# Altium PCB Actuator_Base_Board.PcbDoc
Units mm, origin at the board's own origin, x right, y up, seen from the top; angles counter-clockwise.
Board outline 152.4 x 101.6 mm, 6 copper layers (Top Layer, Layer 3, Layer 1, Layer 2, Layer 4, Bottom Layer), stack 0.958 mm thick; 34 components, 24 nets, 129 pads, 24 vias.
Unrouted connection lines stored in the file: 1.
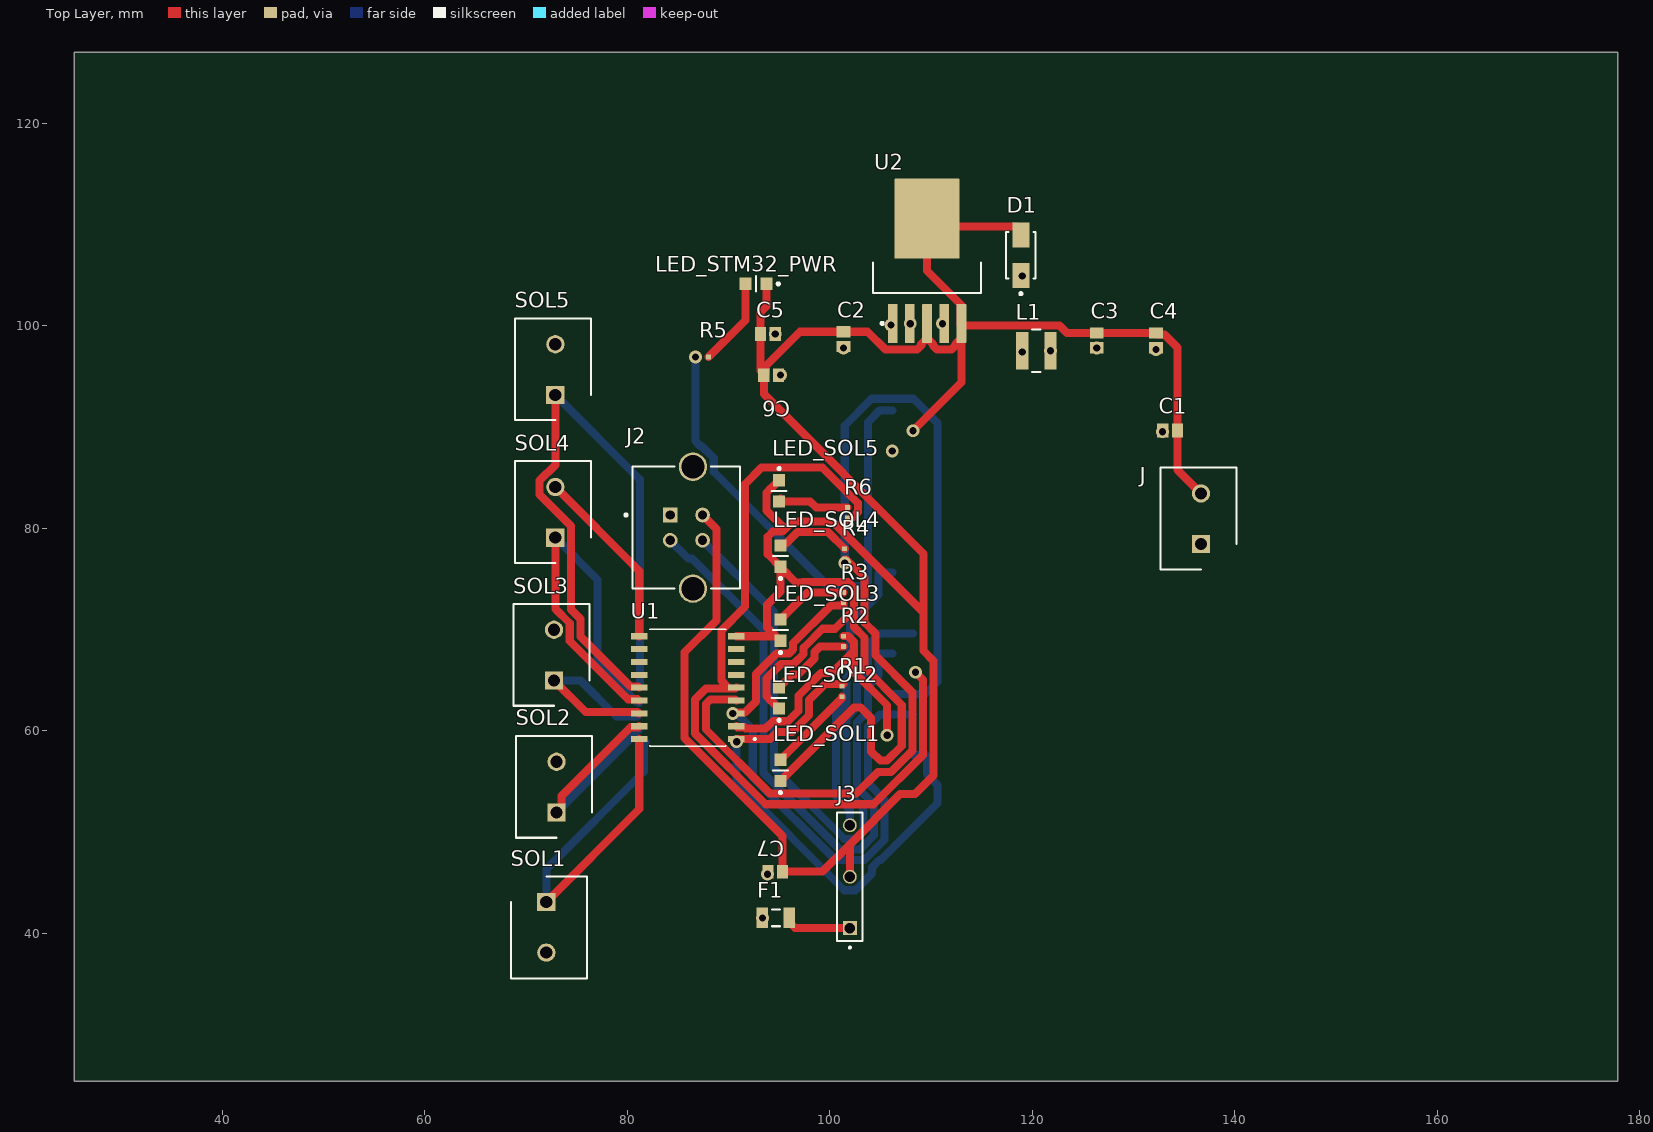
[diagram p0: Top Layer view]
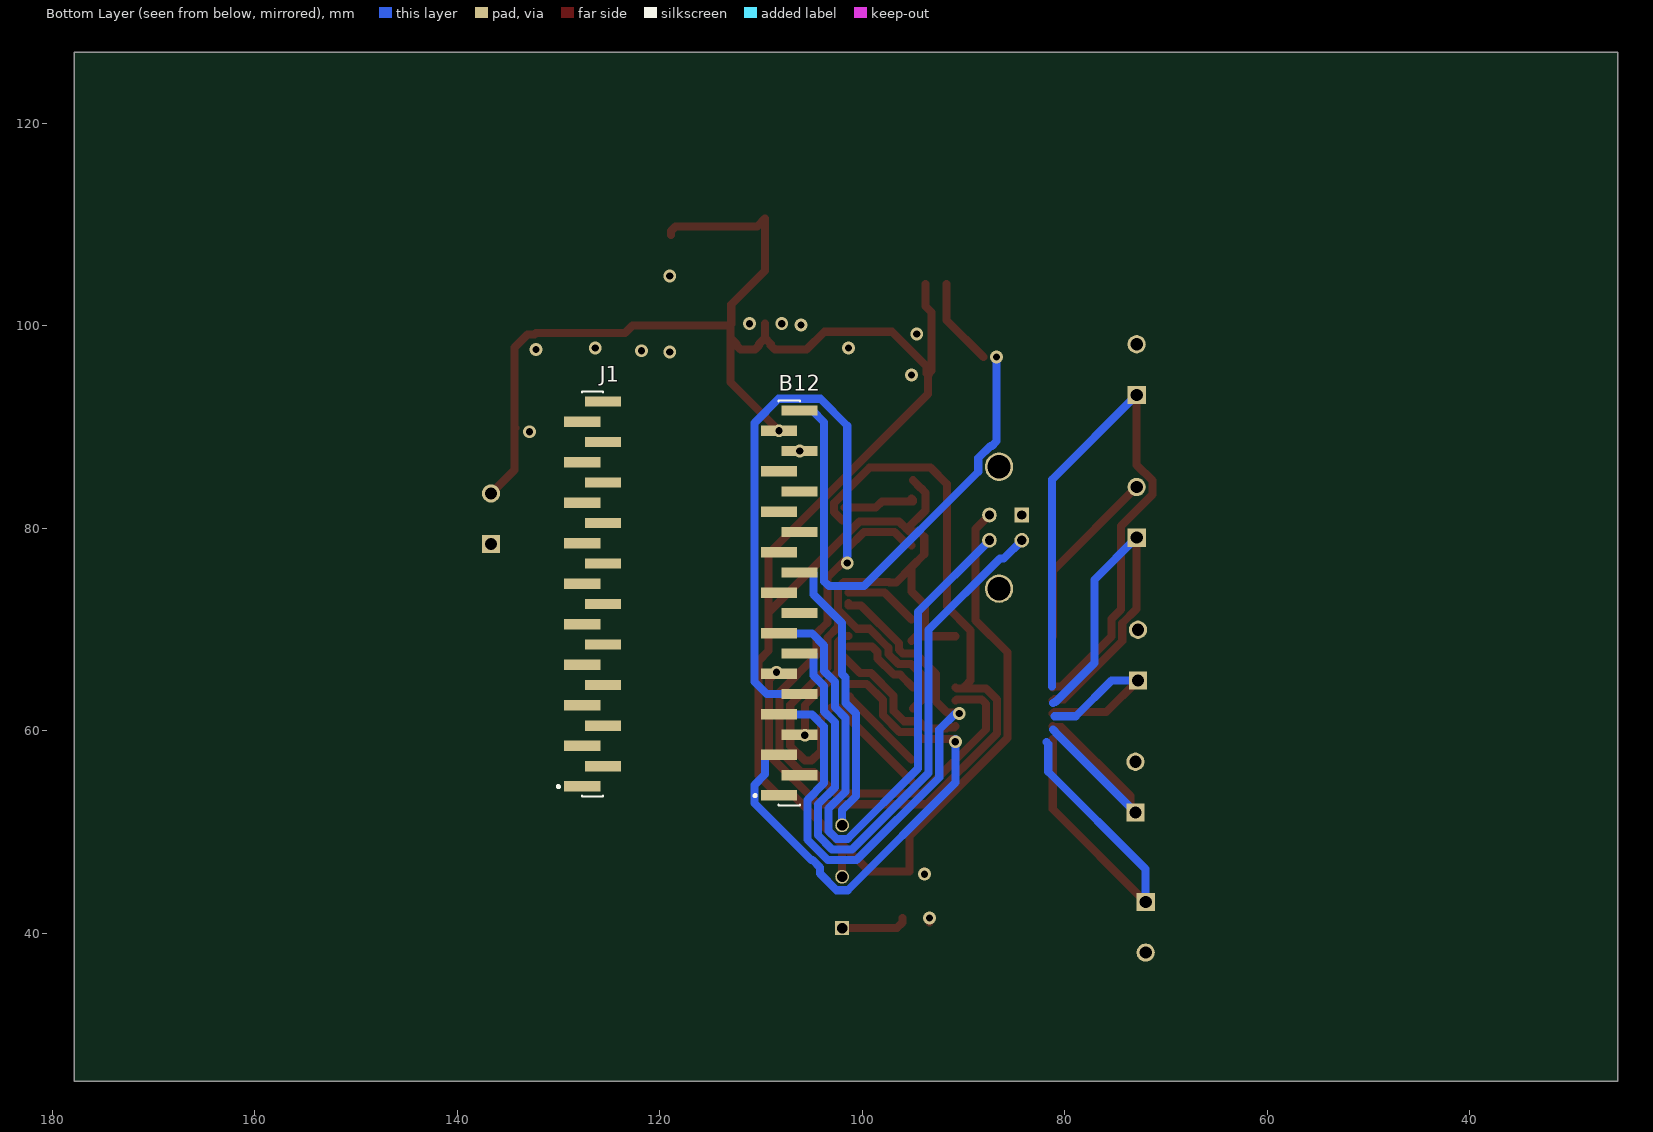
[diagram p1: Bottom Layer view, seen from below]
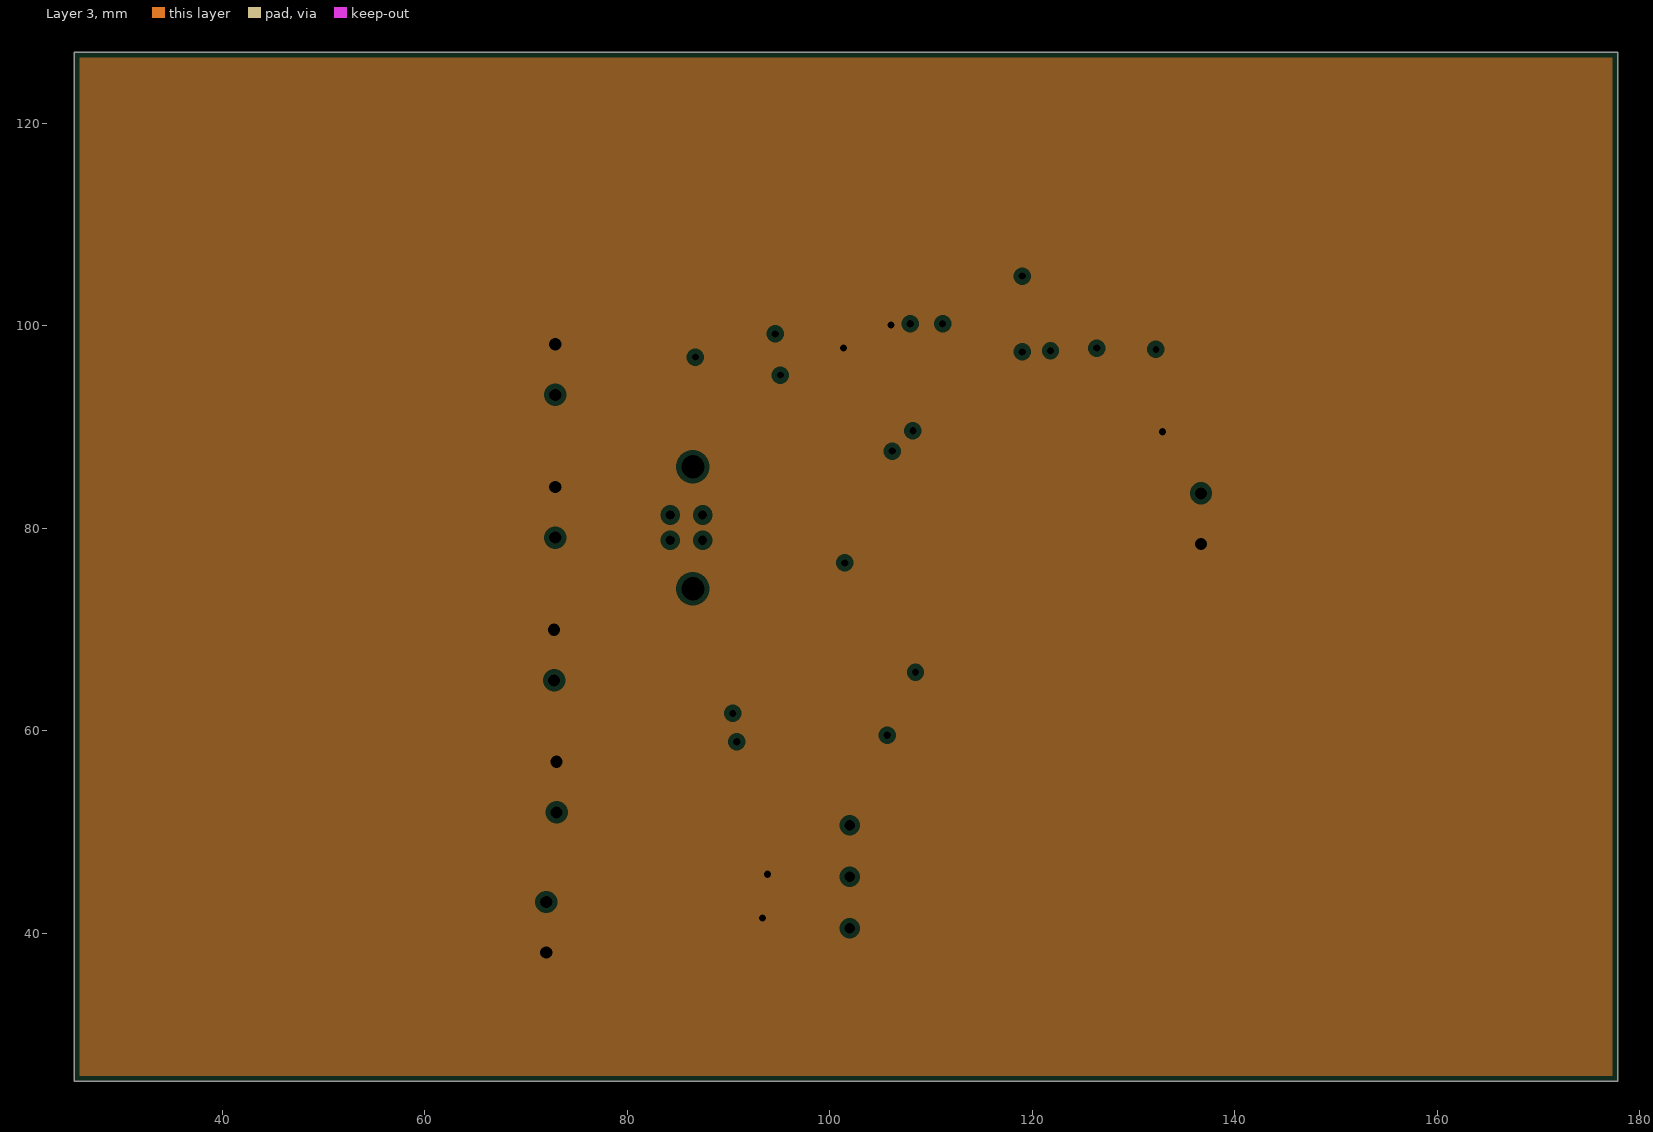
[diagram p2: Layer 3, clearances drawn from the general rule]
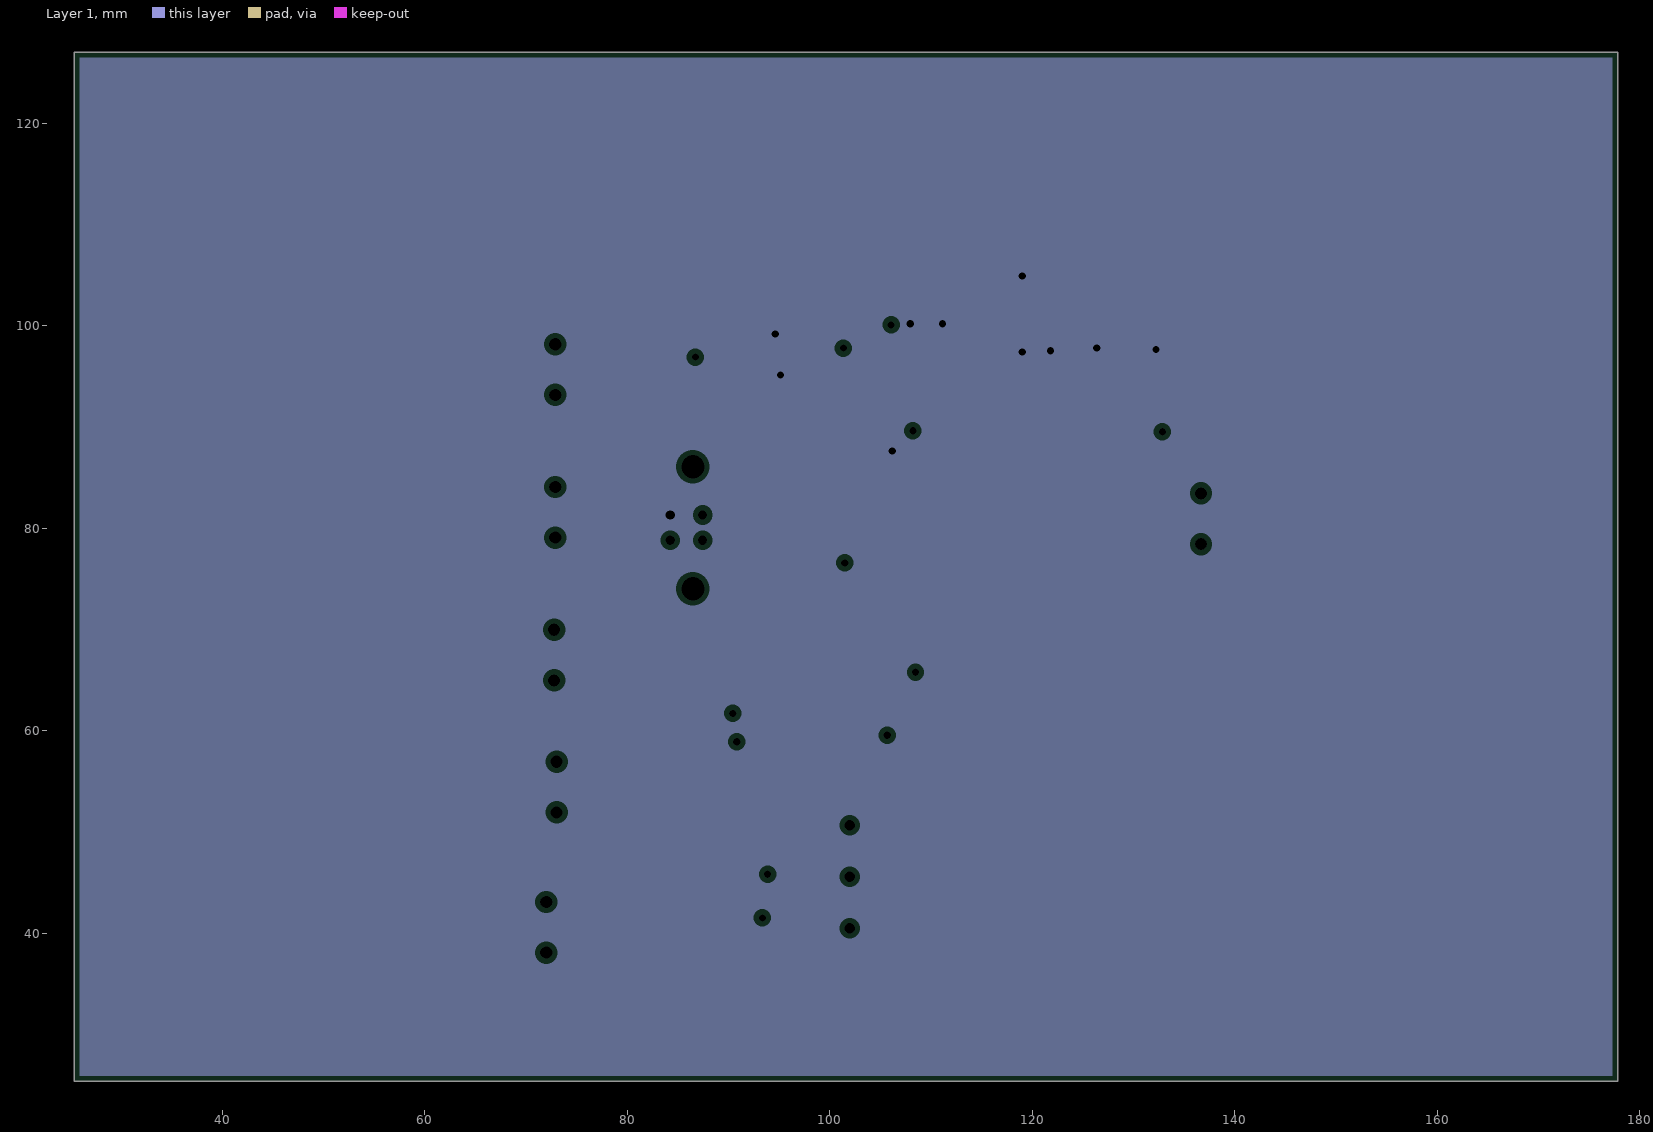
[diagram p3: Layer 1, clearances drawn from the general rule]
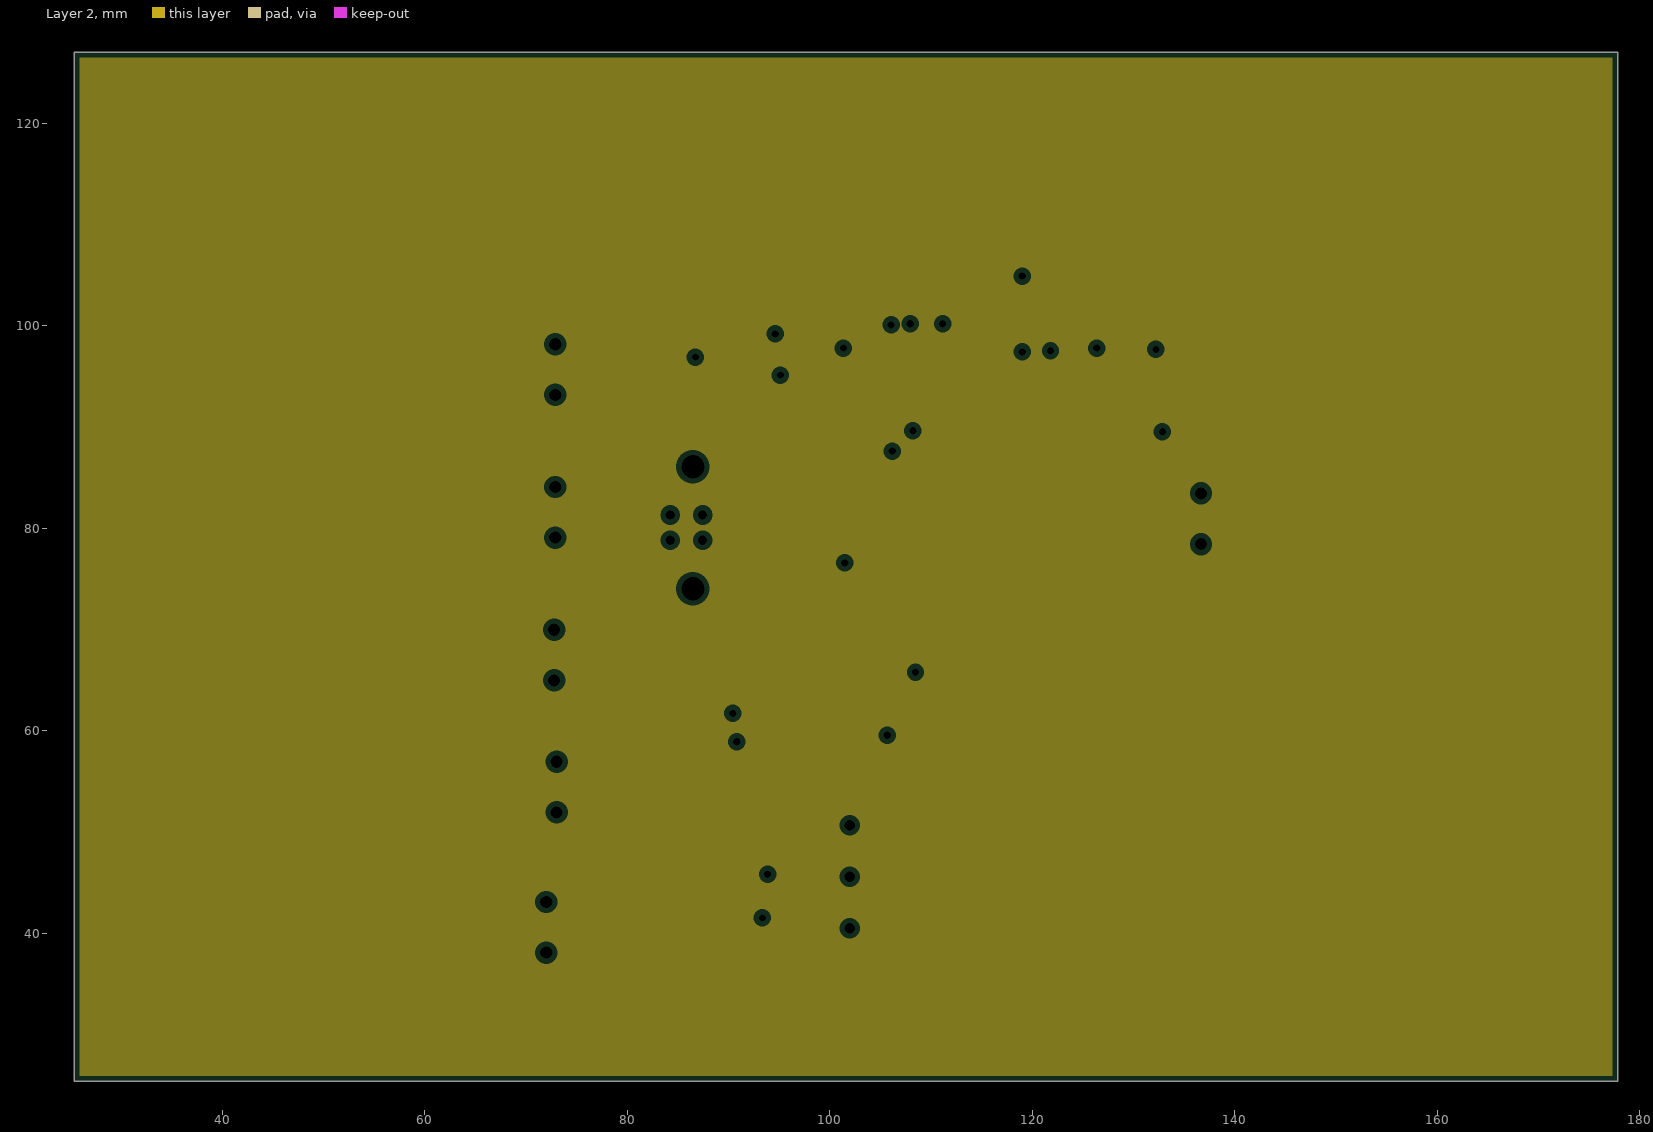
[diagram p4: Layer 2, clearances drawn from the general rule]
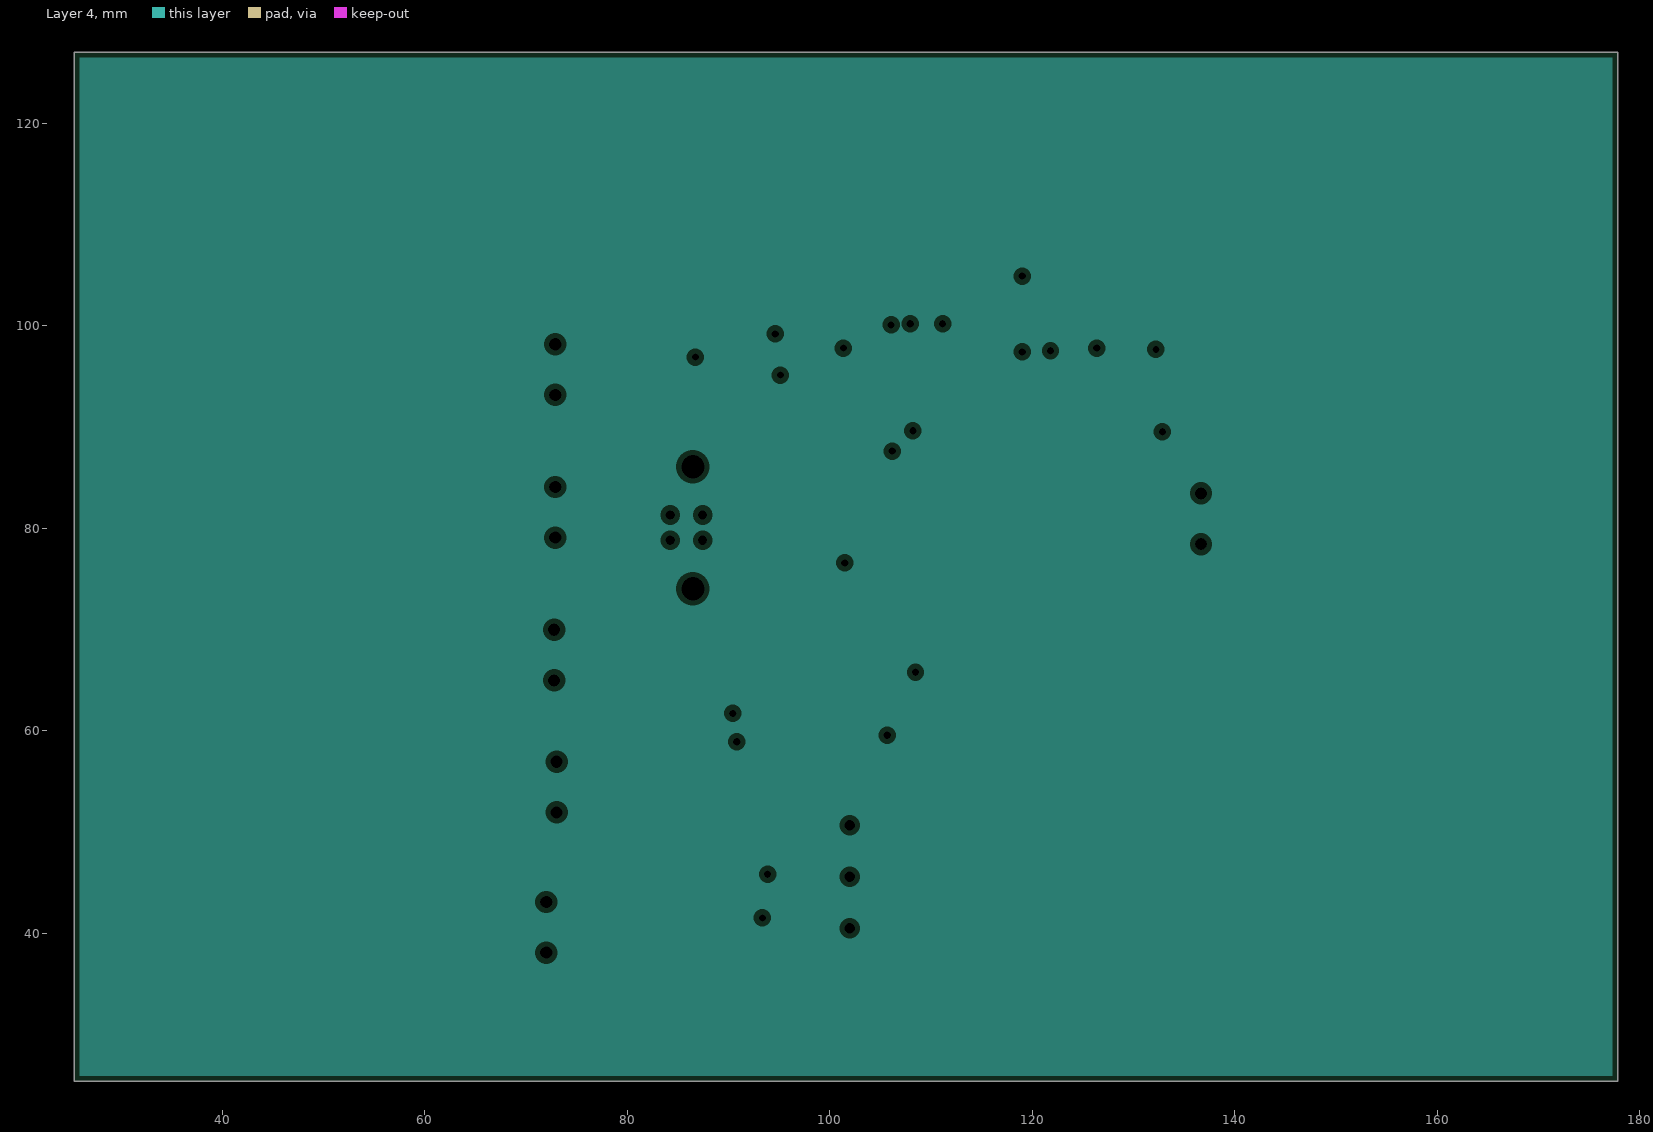
[diagram p5: Layer 4, clearances drawn from the general rule]

## Layer stack, top to bottom
Top Solder: solder mask 0.0102, Solder Resist, Dk 3.5
Top Layer: signal copper 0.0356
Dielectric 6: prepreg 0.0711, PP-006, Dk 4.1
Dielectric 4: prepreg 0.0711, PP-006, Dk 4.1
Layer 3: plane copper 0.035, net +12
Dielectric 2: prepreg 0.0711, PP-006, Dk 4.1
Layer 1: plane copper 0.035, net +5
Dielectric 1: dielectric 0.32, FR-4, Dk 4.8
Layer 2: plane copper 0.035
Dielectric 3: prepreg 0.0711, PP-006, Dk 4.1
Layer 4: plane copper 0.035
Dielectric 5: prepreg 0.0711, PP-006, Dk 4.1
Dielectric 7: prepreg 0.0711, PP-006, Dk 4.1
Bottom Layer: signal copper 0.0356
Bottom Solder: solder mask 0.0102, Solder Resist, Dk 3.5

## Board outline
25.4,25.4 177.8,25.4 177.8,127 25.4,127

## Design rules (kind name [scope] priority, off if disabled: settings)
Clearance [All] p1: gap=0.25 ignorepadtopadclearanceinfootprint=FALSE
PlaneClearance [All] p1: clearance=0.508
PlaneConnect [All] p1: planeconnectstyle=Relief reliefexpansion=0.508 reliefentries=4 reliefconductorwidth=0.254 reliefairgap=0.254
PolygonConnect [All] p1: connectstyle=Relief reliefconductorwidth=0.254 reliefentries=4 polygonreliefangle="90 Angle" airgapwidth=0.254
RoutingVias [All] p1: holewidth=0.711 width=1.27 viastyle="Through Hole" minholewidth=0.711 minwidth=1.27 maxholewidth=0.711 maxwidth=1.27
SolderMaskExpansion [All] p1: expansion=0 istentingtop=FALSE
SupplyNets "Schematic Supply Nets_2" [InNet('+12')] p1: voltage=0.000
SupplyNets "Schematic Supply Nets_1" [InNet('SOL1_STATUS')] p2: voltage=0.000
SupplyNets "Schematic Supply Nets" [InNet('+5')] p3: voltage=0.000
Width [All] p1: maxlimit=1.5 minlimit=0.4 preferedwidth=0.8 minimp=50.000000 maximp=50.000000 favimp=50.000000
28 further rules are at their usual default settings.

## Components (designator, comment, footprint, x,y, rotation, side; value= is the part's Value field where it differs from the comment)
B12 "TMM-120-01-L-S-SM" FP-TMM-120-01-L-S-SM-MFG 107.199,72.629 r90 bottom
C1 "100nF" CAPC2013X145X48LL20T23 133.604,89.662 r0 top
C2 "680uF" CAPC2013X145X48LL20T23 101.346,98.679 r90 top
C3 "220uF" CAPC2013X145X48LL20T23 126.365,98.552 r270 top
C4 "100nF" CAPC2013X145X48LL20T23 132.207,98.552 r90 top
C5 "100nF" CAPC2013X145X48LL20T23 93.89,99.187 r180 top
C6 "10uF" CAPC2013X145X48LL20T23 94.197,95.123 r180 top
C7 "100nF" CAPC2013X145X48LL20T23 94.615,46.101 r180 top
D1 "B340A-13-F" FP-SMA-MFG 118.872,106.966 r90 top
F1 "0466003.NR" FP-0466-MFG 94.678,41.529 r0 top value=0.019Ω
J "4948956" SHDR2W100P0X500_1X2_1000X750X1 136.652,78.439 r90 top
J1 "TMM-120-01-L-S-SM" FP-TMM-120-01-L-S-SM-MFG 126.63,73.517 r90 bottom
J2 "M701-330442" HRWN-M701-330442_V 85.837,80.061 r90 top
J3 "TSW-203-16-T-S" SAMTEC_TSW-203-16-T-S 101.981,40.513 r90 top
L1 "33uH" FP-NR4018-MFG 120.396,97.536 r0 top
LED_SOL1 "SML-LX0805UWC-TR" FP-SML-LX0805UWC-TR-MFG 95.123,56.1 r90 top
LED_SOL2 "SML-LX0805UWC-TR" FP-SML-LX0805UWC-TR-MFG 94.996,63.246 r90 top
LED_SOL3 "SML-LX0805UWC-TR" FP-SML-LX0805UWC-TR-MFG 95.123,69.943 r90 top
LED_SOL4 "SML-LX0805UWC-TR" FP-SML-LX0805UWC-TR-MFG 95.123,77.25 r90 top
LED_SOL5 "SML-LX0805UWC-TR" FP-SML-LX0805UWC-TR-MFG 94.996,83.693 r270 top
LED_STM32_PWR "SML-LX0805UWC-TR" FP-SML-LX0805UWC-TR-MFG 92.71,104.14 r180 top
R1 "1K" RES_ERJU02F1543X 101.219,63.881 r270 top
R2 "1K" RES_ERJU02F1543X 101.346,68.834 r270 top
R3 "1K" RES_ERJU02F1543X 101.346,73.152 r90 top
R4 "1K" RES_ERJU02F1543X 101.473,77.47 r90 top
R5 "1K" RES_ERJU02F1543X 87.503,96.901 r0 top
R6 "1K" RES_ERJU02F1543X 101.727,81.53 r90 top
SOL1 "4948956" SHDR2W100P0X500_1X2_1000X750X1 72.009,43.1 r270 top
SOL2 "4948956" SHDR2W100P0X500_1X2_1000X750X1 73.025,51.943 r90 top
SOL3 "4948956" SHDR2W100P0X500_1X2_1000X750X1 72.771,64.977 r90 top
SOL4 "4948956" SHDR2W100P0X500_1X2_1000X750X1 72.898,79.074 r90 top
SOL5 "4948956" SHDR2W100P0X500_1X2_1000X750X1 72.898,93.171 r90 top
U1 "ULN2803AFW" SOIC127P1030X265-18N 85.979,64.262 r180 top
U2 "LM2596S-5.0/NOPB" KTT0005B_L 109.601,106.426 r90 top

## Footprints (in the part's own frame and the unit in brackets; to place one, negate y for a bottom-side part, rotate by r counter-clockwise, add the part's x,y. Pads: shape width x height; smd on the part's side, far side on the other; paste and mask are expansions set on the pad)
CAPC2013X145X48LL20T23 [mm] "Chip Capacitor, 2-Leads, Body 2.00x1.25mm, IPC High Density"
  rect 1.1x1.35 smd: 1(-0.725,0) 2(0.725,0)
  body extent -1.1,-0.72 1.1,0.72, height 1.45
FP-0466-MFG [mil]
  rect 45x80 smd paste+0 mask+0: 1(-52.5,0) 2(52.5,0)
  silkscreen extent -15,-32 15,32, body extent -79,-44 79,44, height 10
FP-NR4018-MFG [mm]
  rect 1.2x3.7 smd paste+0 mask+0: 1(-1.4,0) 2(1.4,0)
  silkscreen extent -0.43,-2.1 0.43,2.1, body extent -2.2,-2.2 2.2,2.2, height 0.25
FP-SMA-MFG [mm]
  rect 2.5x1.7 smd paste+0 mask+0: 1(-2,0) 2(2,0)
  silkscreen extent -3.92,-1.46 2.3,1.46, body extent -3.35,-1.56 3.35,1.56, height 0.25
FP-SML-LX0805UWC-TR-MFG [mm]
  rect 1.2x1.2 smd paste+0 mask+0: 1(-1.05,0) 2(1.05,0)
  silkscreen extent -2.32,-0.75 0,0.75, body extent -1.75,-0.85 1.75,0.85, height 0.25
FP-TMM-120-01-L-S-SM-MFG [mm]
  rect 1.02x3.56 smd paste+0 mask+0: 1(-19,1.015) 2(-17,-1.015) 3(-15,1.015) 4(-13,-1.015) 5(-11,1.015) 6(-9,-1.015) 7(-7,1.015) 8(-5,-1.015) 9(-3,1.015) 10(-1,-1.015) 11(1,1.015) 12(3,-1.015) 13(5,1.015) 14(7,-1.015) 15(9,1.015) 16(11,-1.015) 17(13,1.015) 18(15,-1.015) 19(17,1.015) 20(19,-1.015)
  silkscreen extent -20,-1.05 20,3.49, body extent -20,-2.41 20,2.41, height 6.22
HRWN-M701-330442_V [mm] "USB, 4-Leads, Body 12.04x10.6mm, Pitch 2.5mm"
  rect 1.45x1.45 hole 0.92: 1(1.25,1.6)
  round 1.45 hole 0.92: 2(-1.25,1.6) 3(-1.25,-1.6) 4(1.25,-1.6)
  round 2.8 hole 2.3: 5(6.02,-0.65) 6(-6.02,-0.65)
  silkscreen extent -6.02,-5.3 6.02,6.08, body extent -7.33,-5.72 7.33,4.99, height 16.5
KTT0005B_L [mm] "DPAK, 5-Leads, Body 10.65x9.65mm, Pitch 1.7mm, IPC High Density"
  rrect11% 3.85x0.95 smd: 1(-6.2,3.4) 2(-6.2,1.7) 3(-6.2,0) 4(-6.2,-1.7) 5(-6.2,-3.4)
  rrect2% 7.9x6.4 smd: 6(4.15,0)
  silkscreen extent -6.32,-5.35 -0.2,5.35, body extent -3.2,-5.32 6.45,5.33, height 4.83
RES_ERJU02F1543X [mm]
  rect 0.475x0.5 smd: 1(-0.512,0) 2(0.512,0)
SAMTEC_TSW-203-16-T-S [mm]
  rect 1.37x1.37 hole 1.02: 01(0,0)
  round 1.37 hole 1.02: 02(5.08,0) 03(10.16,0)
  silkscreen extent -2.02,-1.27 11.43,1.27
SHDR2W100P0X500_1X2_1000X750X1 [mm]
  rect 1.8x1.8 hole 1.2: 1(0,0)
  round 1.8 hole 1.2: 2(5,0)
  silkscreen extent -2.5,-3.5 7.55,4
SOIC127P1030X265-18N [mm]
  rect 1.64x0.6 smd: 1(-4.79,5.08) 2(-4.79,3.81) 3(-4.79,2.54) 4(-4.79,1.27) 5(-4.79,0) 6(-4.79,-1.27) 7(-4.79,-2.54) 8(-4.79,-3.81) 9(-4.79,-5.08) 10(4.79,-5.08) 11(4.79,-3.81) 12(4.79,-2.54) 13(4.79,-1.27) 14(4.79,0) 15(4.79,1.27) 16(4.79,2.54) 17(4.79,3.81) 18(4.79,5.08)
  silkscreen extent -6.71,-5.77 3.75,5.77, body extent -5.78,-5.16 5.78,5.16, height 2.64

## Part data
B12 J1: library part CMP-02766-001494-1, "2MM TERMINAL STRIP", Flammability Rating="UL94 V-0", Insulation Color=Black, Max Operating Temperature=125°C, Min Operating Temperature=-55°C, Connector Type=Header, Contact Finish - Mating=GOLD, Contact Material=Bronze, Contact Plating=Gold, Contact Shape=Square, Contact Type="Male Pin", Fastening Type=Pull, Gender=Male, Insulation Material=Polymer, Lead Free="Lead Free", Mount="Surface Mount", Number of Contacts=20, Number of Positions=20, Number of Rows=1, Packaging=Rail/Tube, REACH SVHC="No SVHC", Series=TMM, Termination=Solder
C1 C2 C3 C4 C5 C6 C7: library part CMP-2007-03205-1, Manufacturer=Vitramon, Part Number=VJ0805Y682KXAMT
D1: library part CMP-1667-00003-3, "DIODE SCHOTTKY 40V 3A SMA", Average Rectified Current=3A, Capacitance=250pF, Case/Package=SMA, Forward Voltage=500mV, Max Forward Surge Current (Ifsm)=80A, Max Operating Temperature=125°C, Max Repetitive Reverse Voltage (Vrrm)=40V, Max Reverse Current=500uA, Min Operating Temperature=-55°C, Package Quantity=5000, Contact Plating=Tin, Current=3A, Current Rating=3A, Element Configuration=Single, Forward Current=3A, Height=2.3mm, Lead Free="Lead Free", Length=4.6mm, Max Reverse Voltage (DC)=40V, Mount="Surface Mount", Number of Pins=2, Output Current=3A, Packaging="Tape and Reel", Peak Non-Repetitive Surge Current=80A, Polarity=Standard, Radiation Hardening=No, REACH SVHC="No SVHC", RoHS Compliant=Yes, Series=-, Termination=SMD/SMT, Voltage=40V, Voltage Rating (DC)=40V, Weight=0.002258oz, Width=2.92mm
F1: library part CMP-08605-000054-1_1, "FUSE BOARD MNT 3A 32VAC/VDC 1206", Fuse Current=3A, Fuse Interrupt Ac Current=50A, Fuse Voltage Drop=75.99mV, Manufacturer=Littelfuse, Max Fuse Ac Voltage=32V, Package=0466, Resistance=0.019Ω, Temperature="-55°C to +90°C", Temperature Range High=+90°C, Temperature Range Low=-55°C, Automotive=No, Category=Fuse, ComponentLink2Description=Datasheet, ComponentLink2URL=https://www.littelfuse.com/~/media/electronics/datasheets/fuses/littelfuse_fuse_466_datasheet.pdf.pdf, Device Class L1="Circuit Protection", Device Class L2=Fuses, Device Class L3=unset, Digikey Description="FUSE BOARD MNT 3A 32VAC/VDC 1206", Fuse Blow Speed=Fast, Fuse I2T=0.576A2Sec, Fuse Interrupt Dc Current=50A, Height=0.66mm, Lead Free=Yes, Manufacturer Part Number=0466003.NR, Max Fuse Dc Voltage=32V, Mouser Description="Surface Mount Fuses 32V 3A VFA Slimline", Octopart=https://octopart.com/0466003.nr-littelfuse-565175, RoHS=TRUE, Voltage Rating=32V
J SOL1 SOL2 SOL3 SOL4 SOL5: "5.08mm Pitch Straight PCB Terminal Block with Screw Term.; Through Hole; 2 Way", Package=None, Availability=Unavailable, MF="RS Pro", MP=4948956, Price=None, SnapEDA_Link=https://www.snapeda.com/parts/4948956/RS%20Pro/view-part/1278850/?ref=snap
J2: library part CMP-1752-00001-1, "Single USB 2.0, Receptacle Connecter, B Type, 4 Position Through Hole, -55 to 85 degC, RoHS, Tray", ComponentLink1Description=Datasheet, ComponentLink1URL=https://cdn.harwin.com/pdfs/M701-330442.pdf, DatasheetVersion=Oct-15, PackageDescription="USB Connecter, 4 Position Through Hole, Length 12.04 mm, Height 16.25 mm, Tail Length 3.1 mm", PackageReference=M701-330442
J3: Package=None, Availability=Unavailable, MP=TSW-203-16-T-S, Price=None
L1: library part CMP-14484-001019-1, "SMD Power Inductors 220uH ±20% 0.17A 4.56Ω", Case/Package=Nonstandard, Current Rating=170mA, DC Resistance (DCR)=4.56R, Inductance=220uH, Max Operating Temperature=125°C, Min Operating Temperature=-25°C, Resistor Type=Wirewound, Saturation Current=275mA, Self Resonant Frequency=4MHz, Test Frequency=100kHz, Tolerance=20%, Core Material=Ferrite, Height - Seated (Max)=0.071inch, Length=0.157inch, Mount="Surface Mount", Packaging="Tape and Reel", RoHS Compliant=Yes, Shielding=Shielded, Width=0.157inch
LED_SOL1 LED_SOL2 LED_SOL3 LED_SOL4 LED_SOL5 LED_STM32_PWR: library part CMP-00229-00139794-1, "SML-LX0805UWC-TR White LED, 0805 Diffused, Rectangle Lens SMD package", Case/Package=0805, Forward Current=20mA, Forward Voltage=3.5V, Illumination Color=White, Lens Color="Clear, Yellow", Max Operating Temperature=85°C, Min Operating Temperature=-40°C, Power Rating=120mW, Approvals="CSA, UL", Luminous Intensity=150mcd, Mount="Surface Mount", NexarPartId=139794, Number of LEDs=1, RoHS=Compliant, Viewing Angle=120°
R1 R2 R3 R4 R5 R6: library part ERJU02F1543X, Package=None, Availability=Unavailable, MP=ERJU02F1543X, Price=None
U1: "Bipolar (BJT) Transistor Array 8 NPN Darlington 50V 500mA - 1.31W Surface Mount 18-SOP", Package="SO-18 Toshiba", Check_prices=https://www.snapeda.com/parts/ULN2803AFW/Toshiba/view-part/?ref=eda, MF=Toshiba, MP=ULN2803AFW, SnapEDA_Link=https://www.snapeda.com/parts/ULN2803AFW/Toshiba/view-part/?ref=snap
U2: library part CMP-0069-00269-3, "SIMPLE SWITCHER® Power Converter 150 KHz 3A Step-Down Voltage Regulator, 5-pin TO-263, Pb-Free", Manufacturer="Texas Instruments", PackageTopMarking="NSUZXYTTE#*LM2596S*-5.0 P+", PowerWise=N, Code_JEDEC=MO-169-AB, ComponentLink1Description="Datasheet URL", ComponentLink1URL=http://www.ti.com/general/docs/lit/getliterature.tsp?genericPartNumber=LM2596&fileType=pdf, CompType=Switcher, PackageDescription="TO-263, Molded, .400 x .390 x .180in, 5 Lead, .067in Pitch, Surface Mount", PackageReference=KTT0005B, PinCount=5, RoHS=Y

## Via types
v1: diameter 1.27, hole 0.711, Top Layer to Bottom Layer, 24 vias

## Nets (pads, with @x,y where several pads share a name; then routed paths per layer and width w, separated by ;. In a path a pad name is that pad's centre, name@x,y a point inside that pad or via, vN(x,y) a via of type N, cw(c..) or ccw(c..) an arc to the next point about the centre after c; other vN are vias at no path point)
3V3: B12.20 R5.1 | length 51.1
  Top Layer w0.8: v1(86.73,96.901) R5.1@86.965,96.901
  Bottom Layer w0.8: v1(86.73,96.901) 86.73,88.6 87.199,88.131 87.336,88.131 88.537,86.93 88.537,85.58 99.822,74.295 103.285,74.295 103.754,74.764 103.754,90.469 104.914,91.629 B12.20
+5: B12.18 C3.2 C4.1 C5.1 C6.1 D1.1 J2.1 L1.1 L1.2 U2.2 U2.4
  other v1: 84.237,81.311 106.172,87.63 95.123,95.123 118.999,97.409 121.793,97.536 132.207,97.663 126.365,97.79 94.615,99.187 107.95,100.203 111.141,100.203 118.999,104.902 118.999,104.902
+12: C1.1 C2.1 C7.2 F1.1 J.1 SOL1.2 SOL2.2 SOL3.2 SOL4.2 SOL5.2 U1.10 U2.1 | length 20
  Top Layer w0.8: SOL4.2 81.189,75.783 U1.10 ; F1.1@93.345,41.084 v1(93.345,41.529) ; C7.2@93.89,45.976 C7.2
  Bottom Layer w0.8: SOL3.2@72.598,69.804 SOL3.2 ; SOL5.2@72.725,97.998 SOL5.2 ; SOL2.2@72.771,56.689 72.771,57.15 72.978,56.943 SOL2.2
  other v1: 93.853,45.847 132.842,89.535 101.346,97.79 106.045,100.076
NetF1_2: F1.2 J3.01 | length 6.7
  Top Layer w0.8: F1.2 96.012,41.084 96.584,40.513 J3.01
NetLED_SOL1_2: LED_SOL1.2 R1.2 | length 8.7
  Top Layer w0.8: LED_SOL1.2 101.219,63.246 R1.2
NetLED_SOL2_2: LED_SOL2.2 R2.2 | length 8.4
  Top Layer w0.8: LED_SOL2.2 96.243,65.543 96.862,65.543 98.473,67.154 98.473,67.773 99.022,68.322 R2.2
NetLED_SOL3_2: LED_SOL3.2 R3.2 | length 7.3
  Top Layer w0.8: LED_SOL3.2 97.794,73.664 R3.2
NetLED_SOL4_2: LED_SOL4.2 R4.2 | length 7.6
  Top Layer w0.8: LED_SOL4.2 95.323,78.5 95.679,78.5 96.808,79.629 99.826,79.629 R4.2
NetLED_SOL5_2: LED_SOL5.2 R6.2 | length 7.3
  Top Layer w0.8: LED_SOL5.2@95.123,82.931 94.996,82.804 LED_SOL5.2 98.061,82.643 98.662,82.042 R6.2
NetLED_STM32_PWR_2: LED_STM32_PWR.2 R5.2 | length 8.7
  Top Layer w0.8: R5.2 91.66,100.546 LED_STM32_PWR.2
NetSOL1_1: SOL1.1 U1.18 | length 39.7
  Top Layer w0.8: SOL1.1 81.189,52.28 U1.18
  Bottom Layer w0.8: SOL1.1 72.009,46.344 81.628,55.963 81.628,58.707 81.818,58.898
NetSOL2_1: SOL2.1 U1.17 | length 23.9
  Top Layer w0.8: SOL2.1 73.525,52.443 73.525,53.557 80.32,60.352 81.089,60.352 U1.17
  Bottom Layer w0.8: SOL2.1 80.899,59.817 80.899,59.884 81.153,60.138
NetSOL3_1: SOL3.1 U1.16 | length 19.5
  Top Layer w0.8: SOL3.1 75.899,61.849 81.026,61.849 81.153,61.722 U1.16
  Bottom Layer w0.8: SOL3.1 75.379,64.977 78.918,61.438 81.026,61.438
NetSOL4_1: SOL4.1 U1.15 | length 39.9
  Top Layer w0.8: SOL4.1 72.898,72.042 74.321,70.619 74.321,68.876 80.078,63.119 81.026,63.119 81.153,62.992 U1.15
  Bottom Layer w0.8: SOL4.1 77.054,74.918 77.054,66.714 80.903,62.865 81.026,62.865 81.153,62.738
NetSOL5_1: SOL5.1 U1.14 | length 66.4
  Top Layer w0.8: SOL5.1 72.898,86.266 71.348,84.716 71.348,83.343 74.448,80.243 74.448,71.977 75.371,71.054 75.371,69.311 80.32,64.362 81.089,64.362 U1.14
  Bottom Layer w0.8: SOL5.1 81.24,84.829 81.24,64.429 81.249,64.42 81.249,64.358
SERVO1_PWM: B12.12 J3.03 | length 28.6
  Bottom Layer w0.8: J3.03 101.981,52.168 100.604,53.545 100.604,61.713 101.654,62.763 101.654,65.278 101.981,65.605 101.981,70.635 104.804,73.458 104.804,75.519 104.914,75.629 B12.12
SOL1_EN: B12.3 R1.1 U1.1 | length 52.7
  Top Layer w0.8: U1.1 94.101,59.182 94.815,59.896 96.3,59.896 97.946,61.542 97.946,63.027 99.562,64.643 101.346,64.643
  Bottom Layer w0.8: v1@90.805,59.182 90.805,54.881 101.428,44.258 102.534,44.258 104.17,45.894 104.17,46.519 104.889,47.238 105.032,47.238 110.644,52.85 110.644,54.659 109.594,55.709 109.594,57.519 109.484,57.629 B12.3
  other v1: 90.805,58.928
SOL1_STATUS: B12.19 C1.2 C2.2 C3.1 C4.2 C5.2 C6.2 C7.1 D1.2 J2.4 J3.02 J.2 LED_SOL1.1 LED_SOL2.1 LED_SOL3.1 LED_SOL4.1 LED_SOL5.1 LED_STM32_PWR.1 U1.9 U2.3 U2.5 U2.6 | length 319.4
  Top Layer w0.8: J2.4 88.812,79.936 88.812,70.909 85.657,67.754 85.657,59.285 95.34,49.602 C7.1 99.297,46.101 101.981,48.785 ; U1.9 LED_SOL3.1@94.674,69.342 ; LED_STM32_PWR.1 93.76,101.923 93.165,101.328 C5.2 93.165,95.555 93.472,95.248 C6.2 ; LED_SOL2.1 94.23,62.962 94.211,62.962 93.746,63.427 93.746,65.165 95.174,66.593 96.427,66.593 97.423,67.589 97.423,68.208 99.297,70.082 100.522,70.082 102.396,71.955 ; LED_SOL5.1 94.23,83.977 94.211,83.977 93.746,83.512 93.746,81.774 95.607,79.913 ; LED_SOL1.1 95.323,55.25 95.342,55.25 102.396,62.304 103.059,62.304 104.08,61.282 104.08,57.972 105,57.052 105.663,57.052 107.107,58.496 107.107,62.568 103.446,66.229 103.446,69.192 102.396,70.242 102.396,71.955 ; LED_SOL3.1 LED_SOL3.1@94.674,69.342 ; LED_SOL4.1 LED_SOL4.1@95.123,76.181 ; J3.02 101.981,48.785 ; v1(108.214,89.629) 113.001,94.416 U2.5@113.001,98.776 ; U2.3 U2.3@109.601,98.776 ; U2.5 U2.5@113.001,100.111 ; D1.2 118.872,109.366 118.422,109.816 110.361,109.816 U2.6 109.601,105.426 112.926,102.101 112.926,100.186 U2.5@113.001,100.111 ; J.2 134.329,85.762 C1.2 134.329,89.826 134.239,89.916 134.308,89.916 134.329,89.937 134.329,97.849 133.051,99.127 132.357,99.127 C4.2 C3.1 123.424,99.277 122.665,100.036 113.076,100.036 U2.5@113.001,100.111 ; C6.2 93.491,95.104 93.491,93.248 109.254,77.485 109.254,71.686 ; C6.2 93.622,95.273 93.622,95.967 97.059,99.404 C2.2 103.734,99.404 105.487,97.651 108.615,97.651 109.026,98.062 109.026,98.201 U2.3@109.601,98.776 ; LED_SOL3.1@94.674,69.342 94.357,69.659 94.338,69.659 93.792,70.205 93.792,72.437 95.123,73.768 LED_SOL4.1@95.123,76.181 ; LED_SOL4.1@95.123,76.181 96.643,74.661 97.306,74.661 97.359,74.714 101.781,74.714 102.396,74.099 102.396,71.955 ; LED_SOL4.1@95.123,76.181 93.873,77.431 93.873,79.169 94.367,79.663 95.357,79.663 95.607,79.913 ; 95.607,79.913 96.373,80.679 100.261,80.679 109.254,71.686 ; 101.981,48.785 106.942,53.746 108.412,53.746 110.257,55.591 110.257,66.908 109.254,67.911 109.254,71.686 ; U2.3@109.601,98.776 110.176,98.201 110.176,98.062 110.587,97.651 112.015,97.651 112.426,98.062 112.426,98.201 U2.5@113.001,98.776 ; U2.5@113.001,98.776 U2.5@113.001,100.111
SOL2_EN: B12.4 R2.1 U1.2 | length 27.4
  Top Layer w0.8: U1.2 90.869,60.352 91.565,60.352 91.685,60.232 93.666,60.232 94.38,60.946 95.865,60.946 96.896,61.977 96.896,63.462 99.127,65.693 100.202,65.693 102.396,67.887 ; R2.1@101.346,69.372 101.781,69.372 102.396,68.757 102.396,67.887 ; v1@105.668,59.821 105.668,62.522 102.396,65.794 102.396,67.887
  other v1: 105.664,59.563
SOL3_EN: B12.5 R3.1 U1.3 | length 58.2
  Top Layer w0.8: U1.3 90.869,61.822 91.638,61.822 92.696,62.88 92.696,65.6 94.739,67.643 95.992,67.643 96.373,68.024 96.373,68.643 100.12,72.39 101.346,72.39 R3.1@101.346,72.614
  Bottom Layer w0.8: v1@90.805,61.722 92.395,60.132 92.395,55.401 100.558,47.238 103.404,47.238 105.416,49.25 105.416,53.188 103.754,54.85 103.754,60.408 104.975,61.629 B12.5
  other v1: 90.424,61.722
SOL4_EN: B12.6 R4.1 U1.4 | length 106.9
  Top Layer w0.8: U1.4 90.669,63.092 89.973,63.092 89.953,63.112 88.226,63.112 87.757,62.643 87.757,60.155 94.112,53.8 102.617,53.8 104.747,55.931 106.027,55.931 108.157,58.061 108.157,63.801 104.496,67.462 104.496,69.627 103.446,70.677 103.446,75.116 101.63,76.932 R4.1@101.473,76.932
  Bottom Layer w0.8: 101.473,77.25 101.473,90.127 104.135,92.789 108.263,92.789 110.644,90.408 110.644,64.85 109.423,63.629 B12.6
  other v1: 101.473,76.581
SOL5_EN: B12.7 R6.1 U1.5 | length 80.4
  Top Layer w0.8: 89.9,64.362 89.826,64.436 89.299,64.963 89.299,69.911 91.646,72.258 91.646,84.382 93.257,85.993 99.261,85.993 102.777,82.477 102.777,81.607 101.942,80.772 101.854,80.772 ; U1.5 90.669,64.162 87.791,64.162 86.707,63.078 86.707,59.72 93.677,52.75 104.331,52.75 109.207,57.626 109.207,65.047 v1(108.463,65.791)
USB_DM: B12.8 J2.2 | length 62.5
  Bottom Layer w0.8: J2.2 86.023,77.025 86.402,77.025 93.445,69.982 93.445,55.836 100.993,48.288 102.969,48.288 104.366,49.685 104.366,52.753 102.704,54.415 102.704,60.843 103.754,61.893 103.754,64.408 104.804,65.458 104.804,67.519 104.914,67.629 B12.8
USB_DP: B12.9 J2.3 | length 62.3
  Bottom Layer w0.8: J2.3 94.495,71.753 94.495,56.271 101.428,49.338 102.534,49.338 103.316,50.12 103.316,52.318 101.654,53.98 101.654,61.278 102.704,62.328 102.704,64.843 103.754,65.893 103.754,68.408 104.975,69.629 B12.9
pads on no net: B12.1 B12.2 B12.10 B12.11 B12.13 B12.14 B12.15 B12.16 B12.17 J1.1 J1.2 J1.3 J1.4 J1.5 J1.6 J1.7 J1.8 J1.9 J1.10 J1.11 J1.12 J1.13 J1.14 J1.15 J1.16 J1.17 J1.18 J1.19 J1.20 J2.5 J2.6 U1.6 U1.7 U1.8 U1.11 U1.12 U1.13

## Polygon pours and split planes (outlines as drawn)
+12 on Layer 3 (split plane): 177.29,25.91 25.91,25.91 25.91,126.49 177.29,126.49
+5 on Layer 1 (split plane): 177.29,25.91 25.91,25.91 25.91,126.49 177.29,126.49
no net on Layer 2 (split plane): 177.29,25.91 25.91,25.91 25.91,126.49 177.29,126.49
no net on Layer 4 (split plane): 177.29,25.91 25.91,25.91 25.91,126.49 177.29,126.49